# Altium PCB PCB1.PcbDoc
Units mil, origin at the board's own origin, x right, y up, seen from the top; angles counter-clockwise.
Board outline 6000 x 4000 mil, 2 copper layers (Top Layer, Bottom Layer); 74 components, 79 nets, 211 pads, 0 vias.
Unrouted connection lines stored in the file: 130.
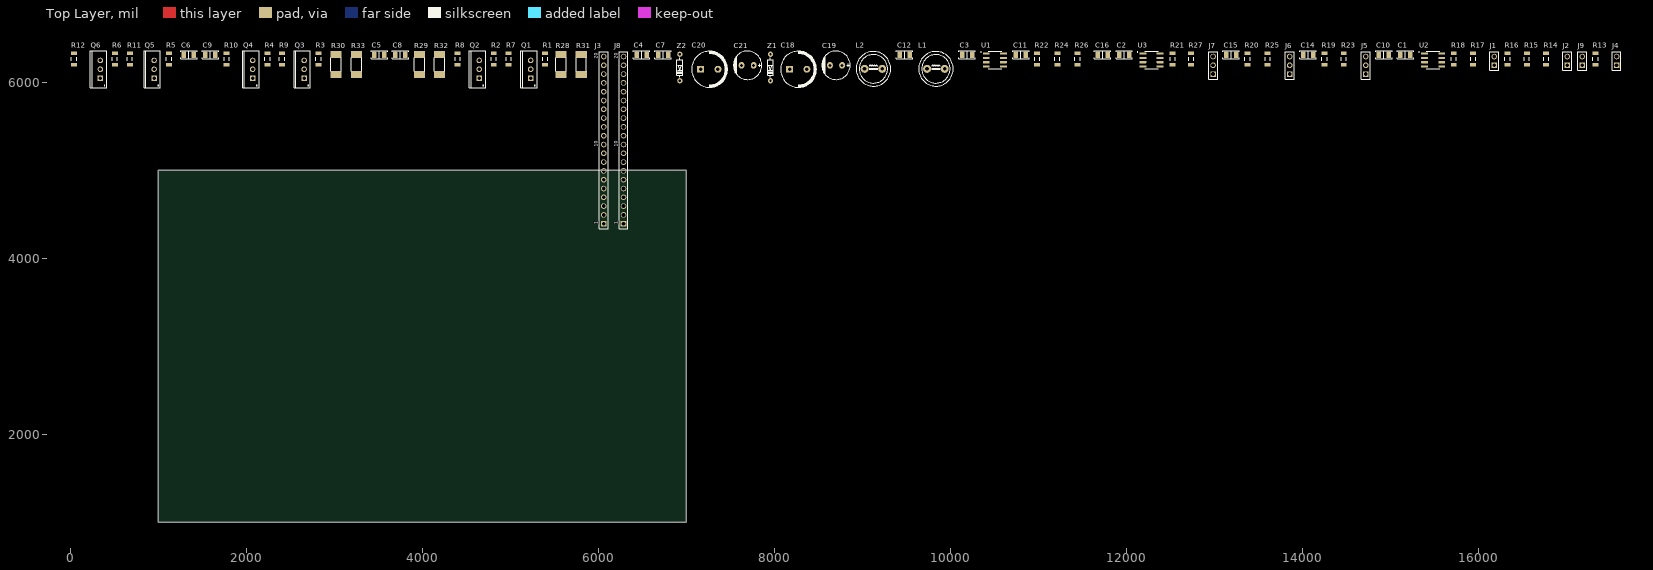
[diagram p0: Top Layer view]
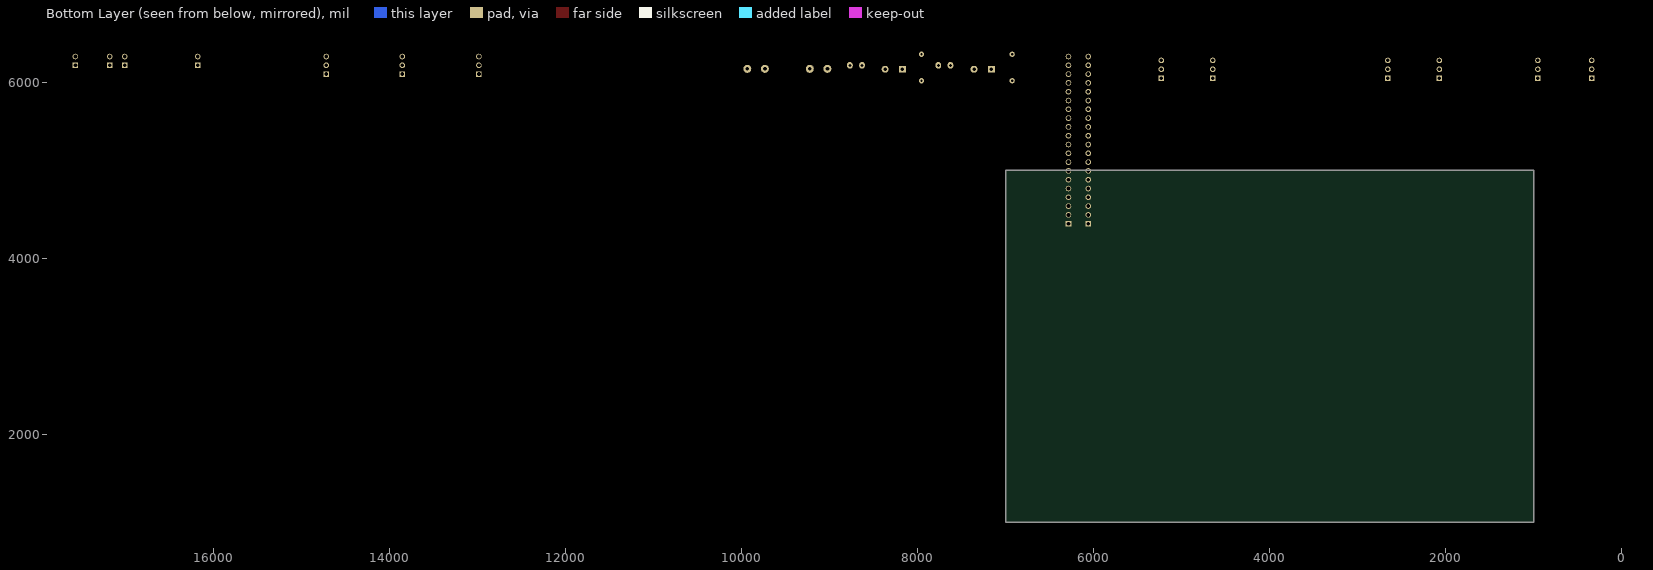
[diagram p1: Bottom Layer view, seen from below]

## Layer stack, top to bottom
Top Solder: solder mask 0.4, Solder Resist, Dk 3.5
Top Layer: signal copper 1.4
Dielectric 1: dielectric 12.6, FR-4, Dk 4.8
Bottom Layer: signal copper 1.4
Bottom Solder: solder mask 0.4, Solder Resist, Dk 3.5

## Board outline
1000,1000 7000,1000 7000,5000 1000,5000

## Design rules (kind name [scope] priority, off if disabled: settings)
Clearance [All] p1: gap=10 ignorepadtopadclearanceinfootprint=FALSE
PolygonConnect [All] p1: connectstyle=Relief reliefconductorwidth=10 reliefentries=4 polygonreliefangle="90 Angle" airgapwidth=10
RoutingVias [All] p1: holewidth=28 width=50 viastyle="Through Hole" minholewidth=28 minwidth=50 maxholewidth=28 maxwidth=50
SolderMaskExpansion [All] p1: expansion=4 istentingtop=FALSE
SupplyNets "Schematic Supply Nets_3" [InNet('+30V')] p1: voltage=0.000
SupplyNets "Schematic Supply Nets_2" [InNet('+12V')] p2: voltage=0.000
SupplyNets "Schematic Supply Nets_1" [InNet('GND')] p3: voltage=0.000
SupplyNets "Schematic Supply Nets" [InNet('+3.3V')] p4: voltage=0.000
Width [All] p1: maxlimit=10 minlimit=10 preferedwidth=10
30 further rules are at their usual default settings.

## Components (designator, comment, footprint, x,y, rotation, side; value= is the part's Value field where it differs from the comment)
C1 "0.1uF" "CAP 1206/3216" 15169.5,6315 r0 top
C2 "0.1uF" "CAP 1206/3216" 11974.5,6315 r0 top
C3 "0.1uF" "CAP 1206/3216" 10189.5,6315 r0 top
C4 "100nF" "CAP 1206/3216" 6489.5,6315 r0 top
C5 "100nF" "CAP 1206/3216" 3509.5,6315 r0 top
C6 "100nF" "CAP 1206/3216" 1344.5,6315 r0 top
C7 "1uF" "CAP 1206/3216" 6734.5,6315 r0 top
C8 "1uF" "CAP 1206/3216" 3749.5,6315 r0 top
C9 "1uF" "CAP 1206/3216" 1589.5,6315 r0 top
C10 "1uF" "CAP 1206/3216" 14924.5,6315 r0 top
C11 "1uF" "CAP 1206/3216" 10799.5,6315 r0 top
C12 "1uF" "CAP 1206/3216" 9479.5,6315 r0 top
C14 "4.7nF" "CAP 1206/3216" 14064.5,6315 r0 top
C15 "4.7nF" "CAP 1206/3216" 13189.5,6315 r0 top
C16 "4.7nF" "CAP 1206/3216" 11729.5,6315 r0 top
C18 "220u'F, 50'V" "Cap electrolitic radial 10x16-5" 8269.5,6150 r0 top
C19 "470u'F, 25'V" "Cap 03" 8699.5,6195 r0 top
C20 "220u'F, 50'V" "Cap electrolitic radial 10x16-5" 7259.5,6150 r0 top
C21 "470u'F, 25'V" "Cap 03" 7694.5,6195 r0 top
J1 "2" HDR_THT_2M_2.54mm 16179.5,6245 r90 top
J2 "2" HDR_THT_2M_2.54mm 17009.5,6245 r90 top
J3 "20" HDR_THT_20M_2.54mm 6059.5,5345 r90 top
J4 "2" HDR_THT_2M_2.54mm 17569.5,6245 r90 top
J5 "3" HDR_THT_3M_2.54mm 14719.5,6195 r90 top
J6 "3" HDR_THT_3M_2.54mm 13854.5,6195 r90 top
J7 "3" HDR_THT_3M_2.54mm 12984.5,6195 r90 top
J8 "20" HDR_THT_20M_2.54mm 6284.5,5345 r90 top
J9 "2" HDR_THT_2M_2.54mm 17179.5,6245 r90 top
L1 "1.2u'H, 3'A" "Inductor 10x12 (200 mils)" 9834.5,6155 r0 top
L2 "1.2u'H, 3'A" "Inductor 10x12 (200 mils)" 9124.5,6155 r0 top
Q1 "IRFB4410Z" TO-220AB 5229.5,6150 r90 top
Q2 "IRFB4410Z" TO-220AB 4644.5,6150 r90 top
Q3 "IRFB4410Z" TO-220AB 2654.5,6150 r90 top
Q4 "IRFB4410Z" TO-220AB 2069.5,6150 r90 top
Q5 "IRFB4410Z" TO-220AB 949.5,6150 r90 top
Q6 "IRFB4410Z" TO-220AB 339.5,6150 r90 top
R1 "10R" "RES 1206 (3216X08L)" 5394.5,6215 r90 top
R2 "10R" "RES 1206 (3216X08L)" 4809.5,6215 r90 top
R3 "10R" "RES 1206 (3216X08L)" 2819.5,6215 r90 top
R4 "10R" "RES 1206 (3216X08L)" 2239.5,6215 r90 top
R5 "10R" "RES 1206 (3216X08L)" 1119.5,6215 r90 top
R6 "10R" "RES 1206 (3216X08L)" 504.5,6215 r90 top
R7 "10k" "RES 1206 (3216X08L)" 4979.5,6215 r90 top
R8 "10k" "RES 1206 (3216X08L)" 4399.5,6215 r90 top
R9 "10k" "RES 1206 (3216X08L)" 2404.5,6215 r90 top
R10 "10k" "RES 1206 (3216X08L)" 1774.5,6215 r90 top
R11 "10k" "RES 1206 (3216X08L)" 674.5,6215 r90 top
R12 "10k" "RES 1206 (3216X08L)" 39.5,6215 r90 top
R13 "33R" "RES 1206 (3216X08L)" 17329.5,6215 r90 top
R14 "33R" "RES 1206 (3216X08L)" 16769.5,6215 r90 top
R15 "33R" "RES 1206 (3216X08L)" 16549.5,6215 r90 top
R16 "33R" "RES 1206 (3216X08L)" 16329.5,6215 r90 top
R17 "33R" "RES 1206 (3216X08L)" 15939.5,6215 r90 top
R18 "33R" "RES 1206 (3216X08L)" 15719.5,6215 r90 top
R19 "100k" "RES 1206 (3216X08L)" 14249.5,6215 r90 top
R20 "100k" "RES 1206 (3216X08L)" 13374.5,6215 r90 top
R21 "100k" "RES 1206 (3216X08L)" 12524.5,6215 r90 top
R22 "10k" "RES 1206 (3216X08L)" 10984.5,6215 r90 top
R23 "1k" "RES 1206 (3216X08L)" 14469.5,6215 r90 top
R24 "10k" "RES 1206 (3216X08L)" 11214.5,6215 r90 top
R25 "1k" "RES 1206 (3216X08L)" 13604.5,6215 r90 top
R26 "10k" "RES 1206 (3216X08L)" 11444.5,6215 r90 top
R27 "1k" "RES 1206 (3216X08L)" 12734.5,6215 r90 top
R28 "10mR 2512 2.5W" Shunt_2512 5574.5,6205 r90 top
R29 "10mR 2512 2.5W" Shunt_2512 3964.5,6205 r90 top
R30 "10mR 2512 2.5W" Shunt_2512 3019.5,6205 r90 top
R31 "10mR 2512 2.5W" Shunt_2512 5804.5,6205 r90 top
R32 "10mR 2512 2.5W" Shunt_2512 4194.5,6205 r90 top
R33 "10mR 2512 2.5W" Shunt_2512 3249.5,6205 r90 top
U1 "UCC27201ADR" SOIC127P599X175-8N 10504.5,6255 r0 top
U2 "UCC27201ADR" SOIC127P599X175-8N 15484.5,6255 r0 top
U3 "UCC27201ADR" SOIC127P599X175-8N 12284.5,6255 r0 top
Z1 "3.3'V, 0.5'W" "DO 35" 7954.5,6170 r90 top
Z2 "3.3'V, 0.5'W" "DO 35" 6924.5,6170 r90 top

## Footprints (in the part's own frame and the unit in brackets; to place one, negate y for a bottom-side part, rotate by r counter-clockwise, add the part's x,y. Pads: shape width x height; smd on the part's side, far side on the other; paste and mask are expansions set on the pad)
"Cap 03" [mil] "diameter: 8'mm"
  oval 65x75 hole 35: 1(68.9,0) 2(-68.9,0)
  silkscreen extent -161,-161 161,161, body extent -159,-159 157,158, height 473
"CAP 1206/3216" [mm] "Chip Capacitor, 2-Leads, Body 3.25x1.60mm, IPC Medium Density"
  rect 1.3x1.8 smd: 1(-1.45,0) 2(1.45,0)
  silkscreen extent -2.37,-1.12 2.37,1.12, body extent -1.6,-0.81 1.6,0.81, height 1.62
"Cap electrolitic radial 10x16-5" [mm] "Cap electrolitic radial 10x16-5-Design:Abbas Basereh"
  rect 2x2 hole 1: 1(-2.5,0)
  round 2 hole 1: 2(2.5,0)
  silkscreen extent -5.1,-5.2 5.3,5.2, body extent -5,-5 5,5, height 16
"DO 35" [mm] "Diode"
  round 1.5 hole 0.7: 1(3.825,0) 2(-3.825,0)
  silkscreen extent -2.88,-0.85 2.8,0.85, body extent -4.1,-0.96 4.08,0.96, height 2.46
HDR_THT_2M_2.54mm [mm] "Pin Header, pitch 2.54 mm, THT, Vertical, single row, 2p"
  rect 1.6x1.6 hole 1.1: 1(-1.27,0)
  round 1.6 hole 1.1: 2(1.27,0)
  silkscreen extent -2.69,-1.27 2.69,1.27, body extent -2.54,-1.27 2.54,1.27, height 8.57
HDR_THT_3M_2.54mm [mm] "Pin Header, pitch 2.54 mm, THT, Vertical, single row, 3p"
  rect 1.6x1.6 hole 1.1: 1(-2.54,0)
  round 1.6 hole 1.1: 2(0,0) 3(2.54,0)
  silkscreen extent -3.96,-1.27 3.96,1.27, body extent -3.81,-1.27 3.81,1.27, height 8.57
HDR_THT_20M_2.54mm [mm] "Pin Header, pitch 2.54 mm, THT, Vertical, single row, 20p"
  rect 1.6x1.6 hole 1.1: 1(-24.13,0)
  round 1.6 hole 1.1: 2(-21.59,0) 3(-19.05,0) 4(-16.51,0) 5(-13.97,0) 6(-11.43,0) 7(-8.89,0) 8(-6.35,0) 9(-3.81,0) 10(-1.27,0) 11(1.27,0) 12(3.81,0) 13(6.35,0) 14(8.89,0) 15(11.43,0) 16(13.97,0) 17(16.51,0) 18(19.05,0) 19(21.59,0) 20(24.13,0)
  silkscreen extent -25.55,-1.27 25.55,1.27, body extent -25.4,-1.27 25.4,1.27, height 8.57
"Inductor 10x12 (200 mils)" [mm] "POWER INDUCTOR 10x12 (200 mils) DESIGNER ABBAS BASEREH"
  round 2.3 hole 1.1: 1(-2.54,0) 2(2.54,0)
  silkscreen extent -5,-5 5,5, body extent -5,-5 5,5, height 12.13
"RES 1206 (3216X08L)" [mm] "Chip Resistor, 2-Leads, Body 3.2x1.6mm, IPC High Density _ (0.125 W)"
  rect 1.05x1.7 smd: 1(-0.377,0) 2(2.973,0)
  silkscreen extent 0.8,-0.75 1.8,0.75, body extent -0.23,-0.76 2.82,0.76, height 0.6
Shunt_2512 [mm] "Chip Resistor, 2-Leads, Body 6.3x3.1mm, IPC High Density _ (0.500 W)"
  rect 2x3.2 smd: 1(-2.85,0) 2(2.85,0)
  silkscreen extent -1.9,-1.5 1.9,1.5, body extent -3.28,-1.52 3.02,1.63, height 1.12
SOIC127P599X175-8N [mm]
  rrect25% 1.97x0.6 smd paste+0 mask+0.102: 1(-2.47,1.905) 2(-2.47,0.635) 3(-2.47,-0.635) 4(-2.47,-1.905) 5(2.47,-1.905) 6(2.47,-0.635) 7(2.47,0.635) 8(2.47,1.905)
  silkscreen extent -4.14,-2.52 1.95,2.52, body extent -3,-2.45 3,2.45, height 1.75
TO-220AB [mm] "TO, Thru-Hole, Vertical, Heatsink Mounted; 3 In-Line Leads; Pitch 2.54 mm"
  rect 1.6x1.6 hole 1: 1(-2.54,0)
  round 1.6 hole 1: 2(0,0) 3(2.54,0)
  silkscreen extent -5.35,-1.85 5.35,2.85, body extent -5.4,-1.9 5.4,2.9, height 19.3

## Part data
C1 C2 C3 C4 C5 C6 C7 C8 C9 C10 C11 C12 C14 C15 C16: library part Cap_Multi_SMD, "Bipolar ceramic capacitor SMD", Package=Package?, Rating=50V, Type=Type?, Validation=Valid, Inflow=inflow?
C18 C20: library part Cap_Elec_220u_50, "Electrolit Capacitor", Package=Package?, Rating=Rating?, Value?="470uF 50V", Type=Type?, Validation=NT
C19 C21: library part Cap_Elec_470u_25, "Electrolit Capacitor", Package=Package?, Rating=Rating?, Value?="220uF 50V", Type=Type?, Validation=NT
J1 J2 J4 J9: library part Con_MPH_2x1_V_THT_2.54, "Header, single row, 2 pin", Package=Package?, Rating=Rating?, Type=Type?, Validation=NT, Inflow=7152
J3 J8: library part Con_MPH_20x1_V_THT_2.54, "Header, single row, 20 pin", Package=Package?, Rating=Rating?, Type=Type?, Validation=NT, Inflow=7152
J5 J6 J7: library part Con_MPH_3x1_V_THT_2.54, "Header, single row, 3 pin", Package=Package?, Rating=Rating?, Type=Type?, Validation=NT, Inflow=7152
L1 L2: library part Ind_1.2u_Bob_3, "Inductor", Package=Package?, Rating=Rating?, Type=Type?, Validation=NT, Inflow="68uH Ferrite Core"
Q1 Q2 Q3 Q4 Q5 Q6: library part NMOS-2, "N-Channel Power MOSFET", ComponentLink1Description="Manufacturer Link", ComponentLink1URL=http://www.irf.com/, DatasheetVersion=PD-9.814, LatestRevisionDate=17-Jul-2002, LatestRevisionNote="Re-released for DXP Platform.", Note="Pin 2 is electrically connected to pin 4.", PackageDescription="TO, Thru-Hole, Vertical, Heatsink Mounted; 3 In-Line Leads; Pitch 2.54 mm", PackageReference=TO-220AB, PackageVersion=Feb-1997, Published=8-Jun-2000, Publisher="Altium Limited"
R1 R2 R3 R4 R5 R6 R7 R8 R9 R10 R11 R12 R13 R14 R15 R16 R17 R18 R19 R20 R21 R22 R23 R24 R25 R26 R27: library part Res_SMD_1206, "Resistor", Package=1206, Rating=0.25W, Type=10%, Validation=Valid, Inflow=inflow?
R28 R29 R30 R31 R32 R33: library part Res_Shunt_SMD, "Resistor", Package=Package?, Rating=Precision, Type=Shunt, Validation=NT, Inflow=inflow?
U1 U2 U3: "3-A, 120-V half bridge gate driver with 8-V UVLO and negative voltage handling", Package="SOIC-8 Texas Instruments", Check_prices=https://www.snapeda.com/parts/UCC27201ADR/Texas+Instruments/view-part/?ref=eda, MF="Texas Instruments", MP=UCC27201ADR, SnapEDA_Link=https://www.snapeda.com/parts/UCC27201ADR/Texas+Instruments/view-part/?ref=snap
Z1 Z2: library part Semi_Diod_Zener_THT, "Zener Diode", Package=Package?, Rating=Rating?, Value?="SR540 40V 5A", Type=Type?, Validation=Valid

## Nets (pads, with @x,y where several pads share a name; then routed paths per layer and width w, separated by ;. In a path a pad name is that pad's centre, name@x,y a point inside that pad or via, vN(x,y) a via of type N, cw(c..) or ccw(c..) an arc to the next point about the centre after c; other vN are vias at no path point)
+3.3V: C21.1 J3.19 L2.2
+12V: C10.1 C11.1 C12.1 C19.1 C20.1 J9.1 L1.2 U1.1 U2.1 U3.1
+30V: C4.1 C5.1 C6.1 C7.1 C8.1 C9.1 C18.1 Q1.2 Q3.2 Q5.2
GND: C4.2 C5.2 C6.2 C7.2 C8.2 C9.2 C10.2 C11.2 C12.2 C14.2 C15.2 C16.2 C18.2 C19.2 C20.2 C21.2 J3.20 J5.2 J6.2 J7.2 J8.1 J8.2 J9.2 R22.1 R24.1 R26.1 R28.1 R29.1 R30.1 R31.1 R32.1 R33.1 U1.7 U2.7 U3.7 Z1.1 Z2.1
NetC1_1: C1.1 Q1.3 Q2.2 R7.1 R19.1 U2.4
NetC1_2: C1.2 U2.2
NetC2_1: C2.1 Q3.3 Q4.2 R9.1 R20.1 U3.4
NetC2_2: C2.2 U3.2
NetC3_1: C3.1 Q5.3 Q6.2 R11.1 R21.1 U1.4
NetC3_2: C3.2 U1.2
NetC14_1: C14.1 J5.3 R23.2
NetC15_1: C15.1 J6.3 R25.2
NetC16_1: C16.1 J7.3 R27.2
NetJ1_1: J1.1 R17.2
NetJ1_2: J1.2 R18.2
NetJ2_1: J2.1 R15.2
NetJ2_2: J2.2 R16.2
NetJ3_1: J3.1
NetJ3_2: J3.2
NetJ3_3: J3.3
NetJ3_4: J3.4
NetJ3_5: J3.5
NetJ3_7: J3.7
NetJ3_8: J3.8
NetJ3_9: J3.9
NetJ3_10: J3.10
NetJ3_11: J3.11
NetJ3_12: J3.12
NetJ3_13: J3.13
NetJ3_14: J3.14
NetJ3_15: J3.15
NetJ3_16: J3.16
NetJ3_17: J3.17
NetJ3_18: J3.18
NetJ4_1: J4.1 R13.2
NetJ4_2: J4.2 R14.2
NetJ5_1: J5.1 Q2.3 R8.1 R28.2 R31.2
NetJ6_1: J6.1 Q4.3 R10.1 R29.2 R32.2
NetJ7_1: J7.1 Q6.3 R12.1 R30.2 R33.2
NetJ8_3: J8.3
NetJ8_4: J8.4
NetJ8_5: J8.5
NetJ8_6: J8.6
NetJ8_7: J8.7
NetJ8_9: J8.9
NetJ8_10: J8.10
NetJ8_11: J8.11
NetJ8_12: J8.12
NetJ8_13: J8.13
NetJ8_14: J8.14
NetJ8_15: J8.15
NetJ8_16: J8.16
NetJ8_17: J8.17
NetJ8_18: J8.18
NetJ8_19: J8.19
NetJ8_20: J8.20
NetL1_1: L1.1 Z1.2
NetL2_1: L2.1 Z2.2
NetQ1_1: Q1.1 R1.2 R7.2
NetQ2_1: Q2.1 R2.2 R8.2
NetQ3_1: Q3.1 R3.2 R9.2
NetQ4_1: Q4.1 R4.2 R10.2
NetQ5_1: Q5.1 R5.2 R11.2
NetQ6_1: Q6.1 R6.2 R12.2
NetR1_1: R1.1 U2.3
NetR2_1: R2.1 U2.8
NetR3_1: R3.1 U3.3
NetR4_1: R4.1 U3.8
NetR5_1: R5.1 U1.3
NetR6_1: R6.1 U1.8
NetR13_1: R13.1 U2.5
NetR14_1: R14.1 U2.6
NetR15_1: R15.1 U3.5
NetR16_1: R16.1 U3.6
NetR17_1: R17.1 U1.5
NetR18_1: R18.1 U1.6
NetR19_2: R19.2 R22.2 R23.1
NetR20_2: R20.2 R24.2 R25.1
NetR21_2: R21.2 R26.2 R27.1
pads on no net: J3.6 J8.8

## Text inside footprints (layer, text, board x,y; h text height)
J3: Top Overlay "1" at 5992.57,4387.52 h39.37 r90; Top Overlay "10" at 5992.57,5267.05 h39.37 r90
J8: Top Overlay "1" at 6217.57,4387.52 h39.37 r90; Top Overlay "10" at 6217.57,5267.05 h39.37 r90